# EAGLE board 7x6keyboard_untested (EAGLE 6.5.0)
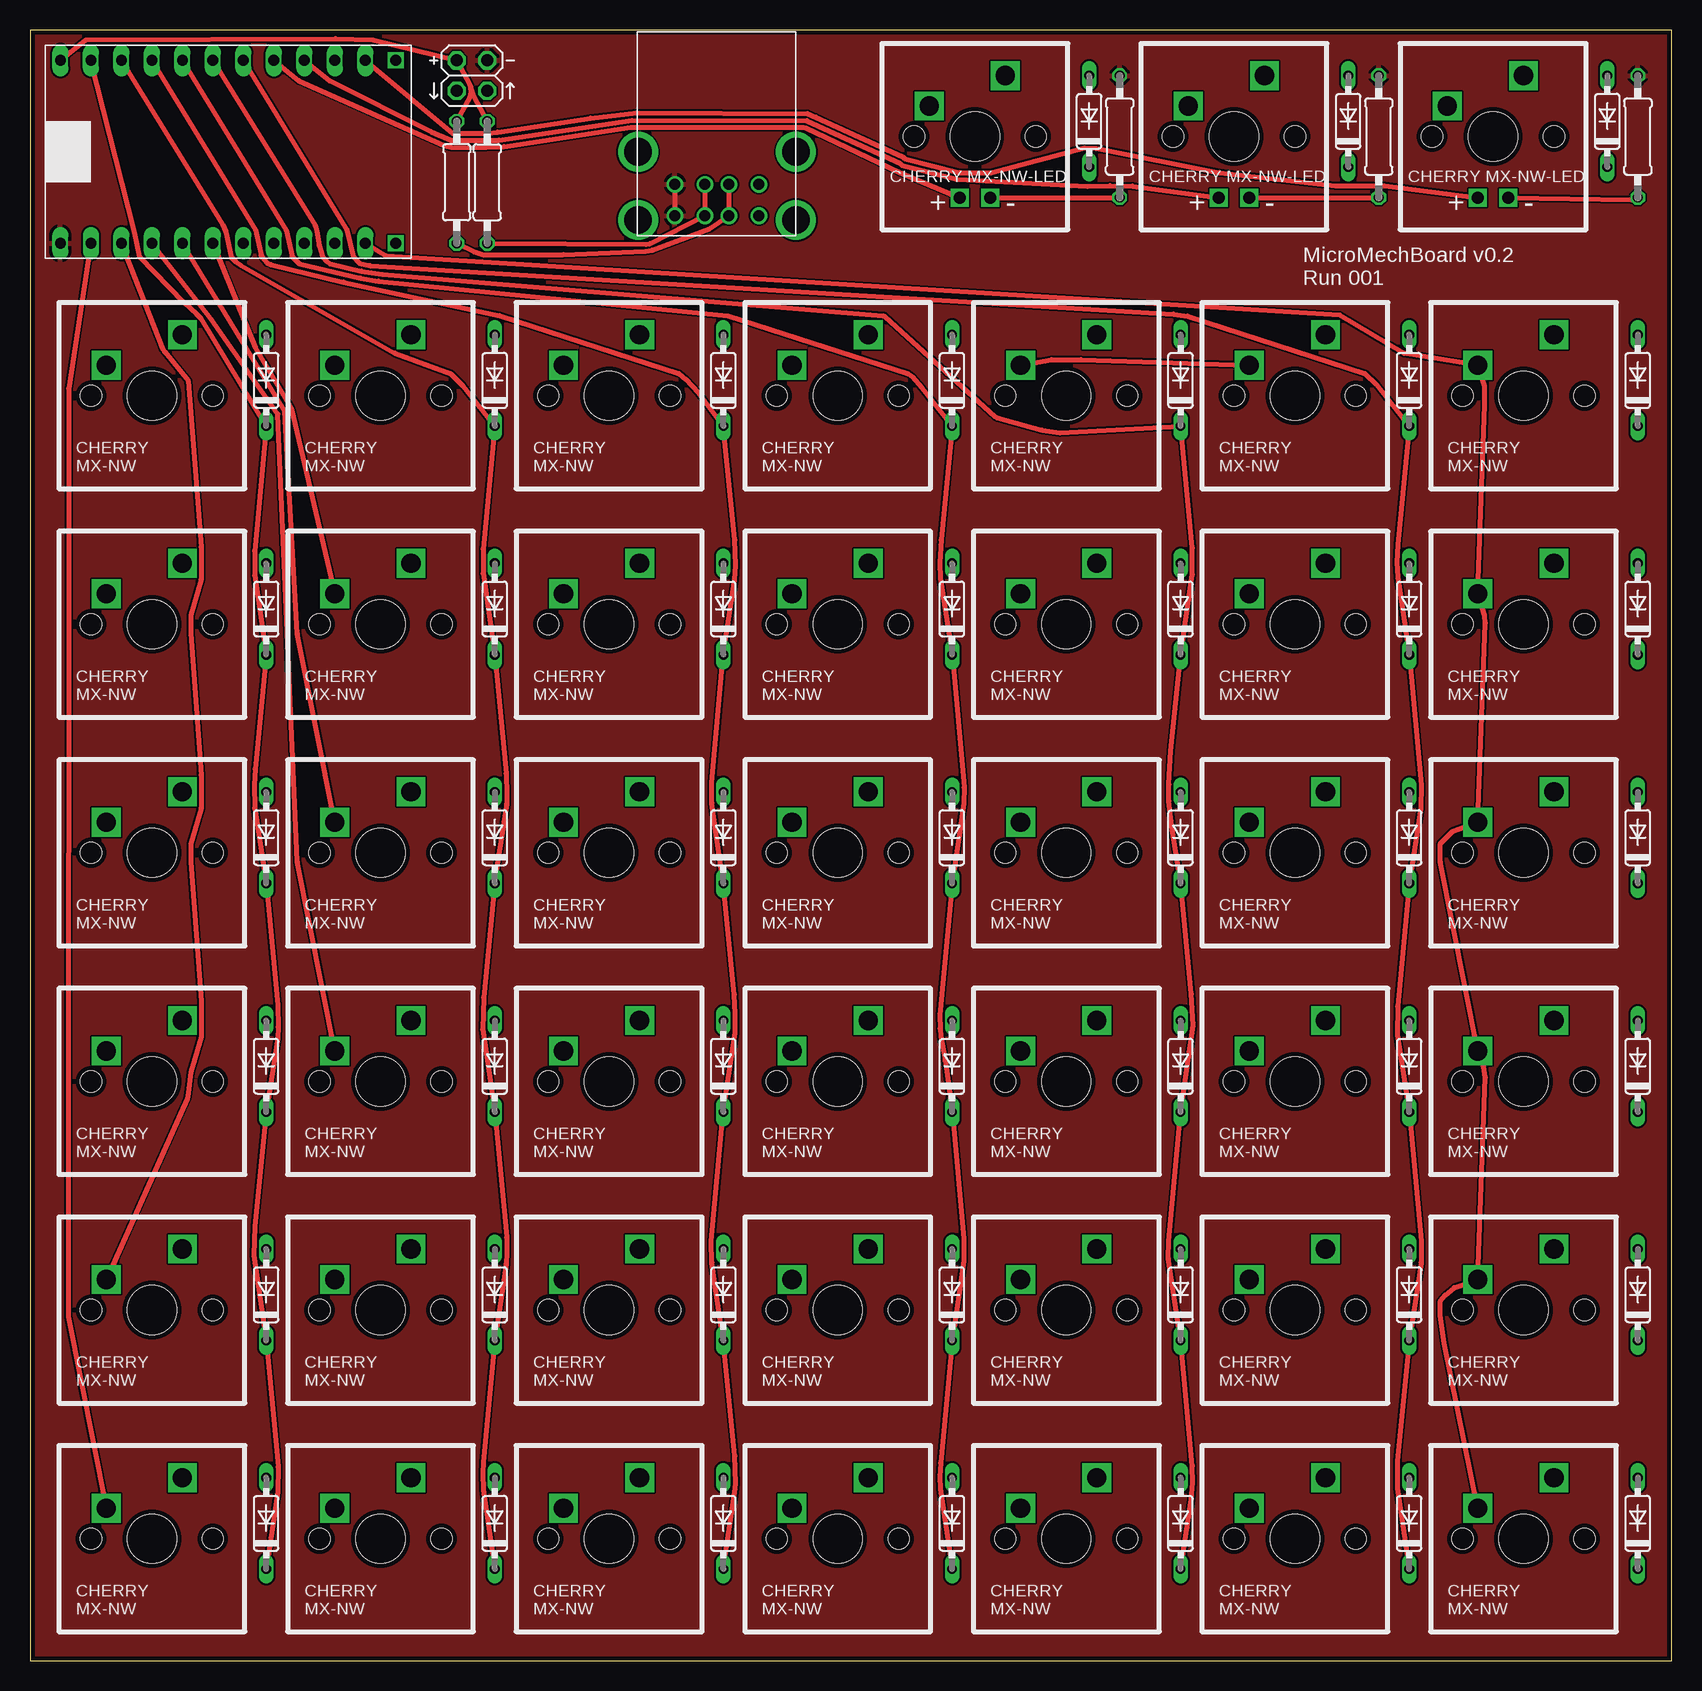
[diagram p0: board, top side]
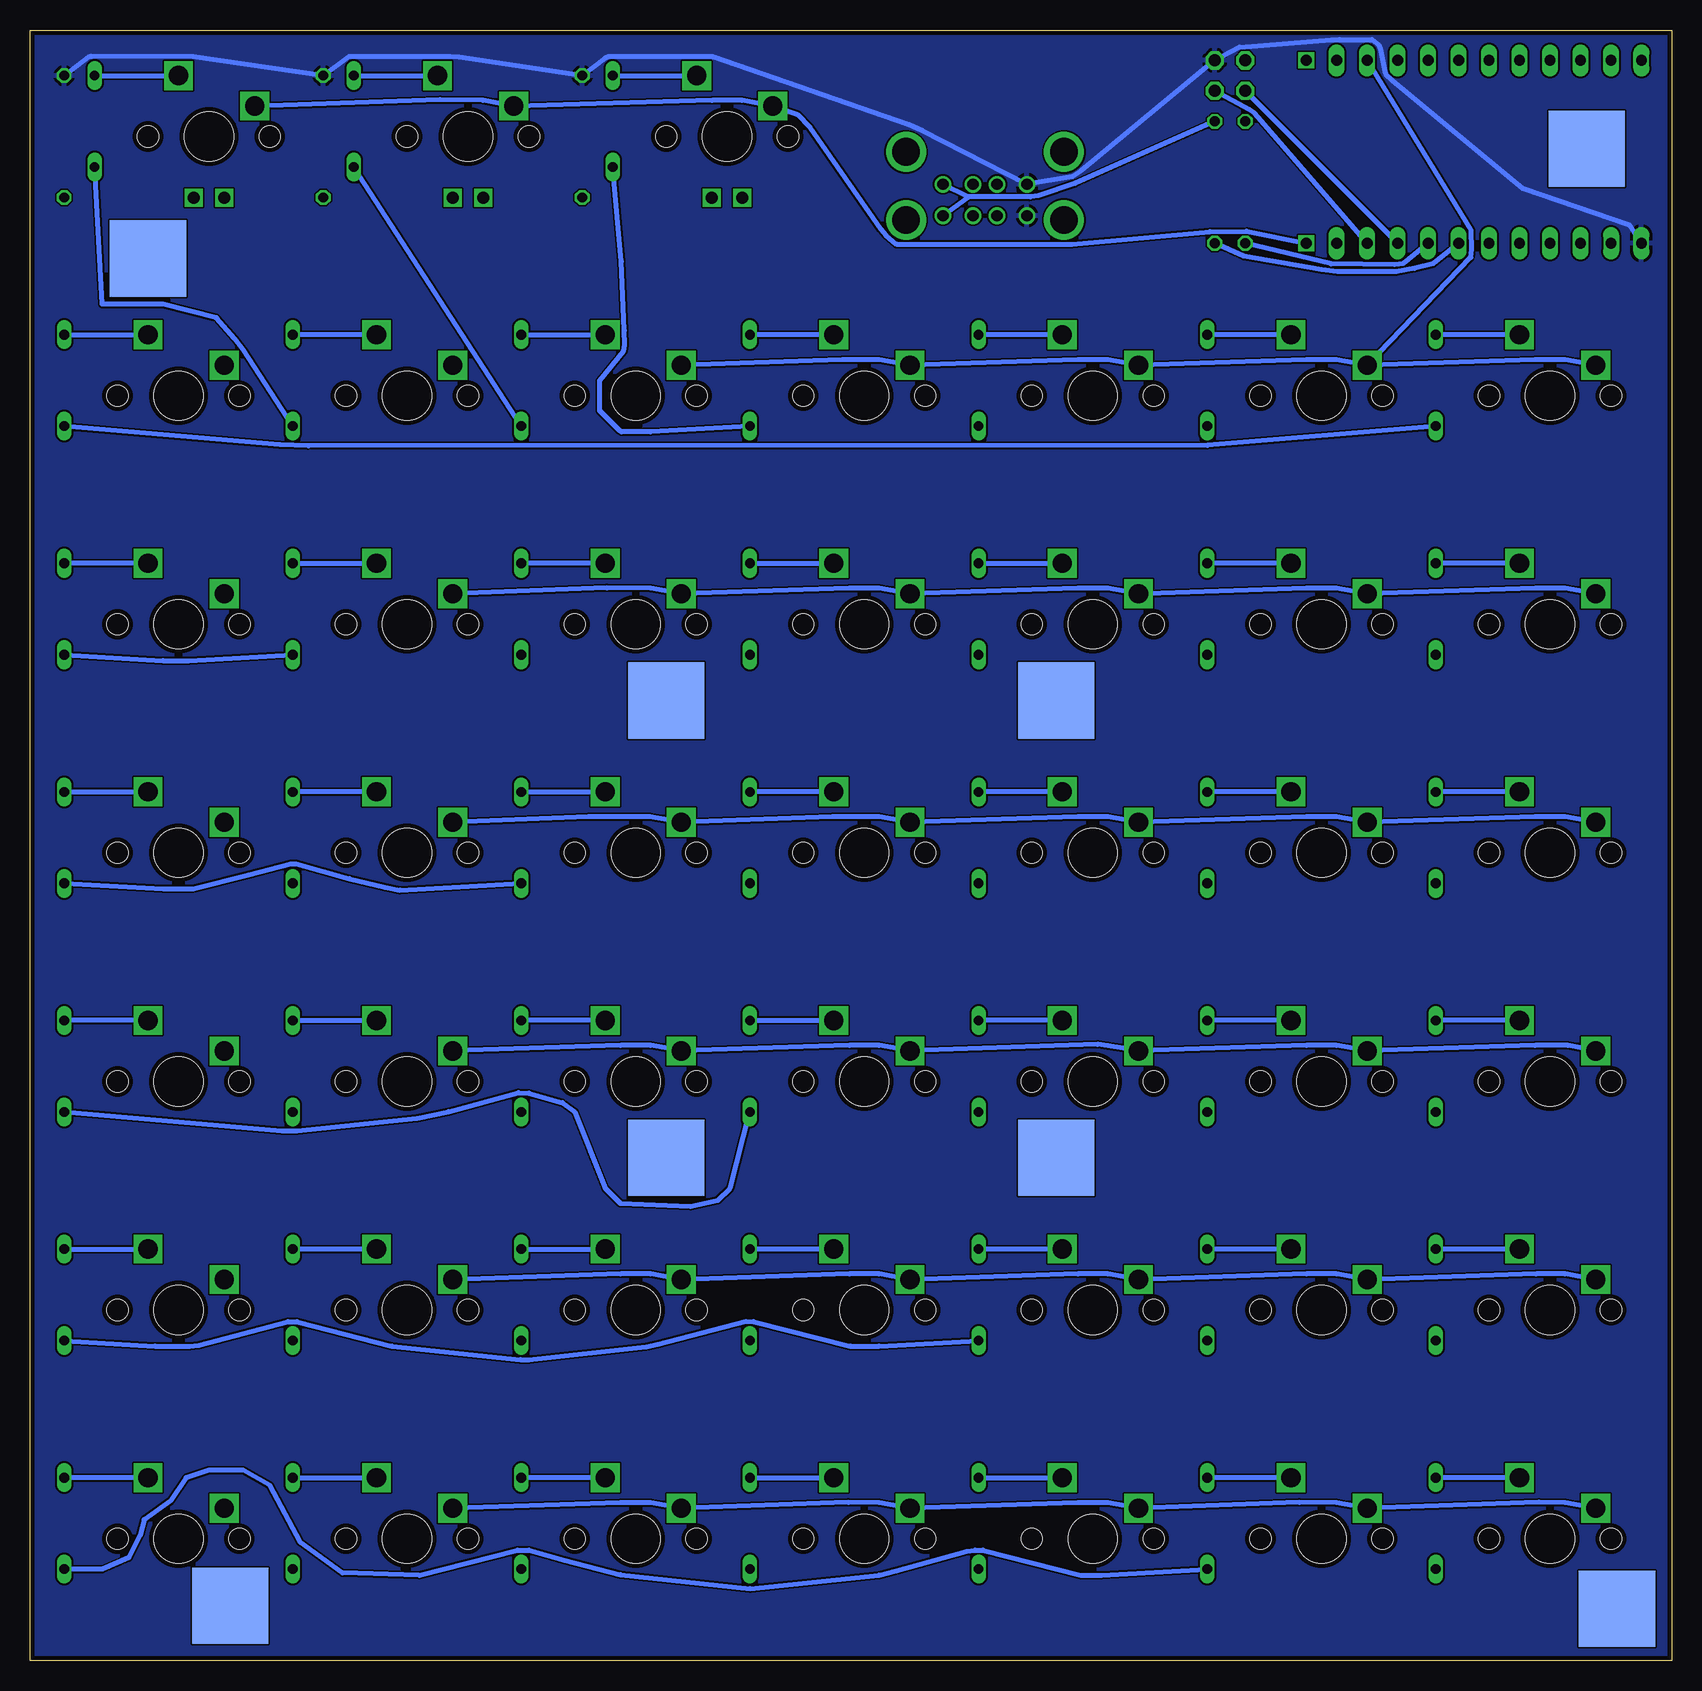
[diagram p1: board, bottom side, seen from below]

Size 136.83 x 135.88 mm. Coordinates in mm from the lower left corner, seen from the top.
Outline: 0,0 136.83,0 136.83,135.88 0,135.88 0,0
Copper layers (1*16): Top 0.0356mm / dielectric 1.5011mm / Bottom 0.0356mm
Design rules "LaenPCBOrder": minimum track width 6mil, minimum drill 13mil, track to track 6mil, track to pad 6mil, pad to pad 6mil, via to via 6mil, smd to smd 6mil, copper to edge 15mil, drill to drill 6mil, minimum pad ring 7mil, minimum via ring 7mil, stop-mask expansion 4mil, vias tented up to drill 0mil, thermal gap 10mil

## Footprints (pad centres in the part's own frame; a part is rotated, then mirrored left to right if it is on the bottom)
DO35-7 = drill 0.813 long: A 3.81,0; C -3.81,0
2X02 = drill 1.016 octagon: 1 -1.27,-1.27; 2 -1.27,1.27; 3 1.27,-1.27; 4 1.27,1.27
0207/10 = drill 0.813 octagon: 1 -5.08,0; 2 5.08,0
CHERRYMX-NN = drill 1.6 square: SIDE -3.81,2.54; UP 2.54,5.08 | hole 1.753: -5.08,0; 5.08,0 | hole 4.089: 0,0
TEENSY2 = drill 0.9 long: GND -7.62,16.51; PB0 -7.62,13.97; PB1 -7.62,11.43; PB2 -7.62,8.89; PB3 -7.62,6.35; PB4 7.62,-6.35; PB5 7.62,-3.81; PB6 7.62,-1.27; PB7 -7.62,3.81; PC6 -7.62,-8.89; PD0 -7.62,1.27; PD1 -7.62,-1.27; PD2 -7.62,-3.81; PD3 -7.62,-6.35; PD7 7.62,-8.89; PF0 7.62,13.97; PF1 7.62,11.43; PF4 7.62,8.89; PF5 7.62,6.35; PF6 7.62,3.81; PF7 7.62,1.27; VCC 7.62,16.51 | drill 0.9 square: PC7 -7.62,-11.43; PD6 7.62,-11.43
CHERRYMX-NN-LED = drill 1 square: LED+ -1.27,-5.08; LED- 1.27,-5.08 | drill 1.6 square: SIDE -3.81,2.54; UP 2.54,5.08 | hole 1.753: -5.08,0; 5.08,0 | hole 4.089: 0,0
DUAL-USB-A = drill 0.92: +DATA_1 7.57,2.71; +DATA_2 7.57,5.33; -DATA_1 5.57,2.71; -DATA_2 5.57,5.33; GND_1 10.07,2.71; GND_2 10.07,5.33; VCC_1 3.07,2.71; VCC_2 3.07,5.33 | drill 2.3: S1 0,5.68; S2 0,0; S3 13.14,5.68; S4 13.14,0
MOUNTING-PAD = smd 6.35 x 6.35 bottom: P$1 0,0

## Placement (x,y rotation side)
D1  [DO35-7]  19.68,49.53 90 top
D2  [DO35-7]  38.73,49.53 90 top
D3  [DO35-7]  57.78,49.53 90 top
D4  [DO35-7]  76.83,49.53 90 top
D5  [DO35-7]  95.89,49.53 90 top
D6  [DO35-7]  114.94,49.53 90 top
D7  [DO35-7]  19.68,68.58 90 top
D8  [DO35-7]  38.73,68.58 90 top
D9  [DO35-7]  57.78,68.58 90 top
D10  [DO35-7]  76.83,68.58 90 top
D11  [DO35-7]  95.89,68.58 90 top
D12  [DO35-7]  114.94,68.58 90 top
D13  [DO35-7]  19.68,11.43 90 top
D14  [DO35-7]  38.73,11.43 90 top
D15  [DO35-7]  57.78,11.43 90 top
D16  [DO35-7]  76.83,11.43 90 top
D17  [DO35-7]  95.89,11.43 90 top
D18  [DO35-7]  114.94,11.43 90 top
D19  [DO35-7]  19.68,30.48 90 top
D20  [DO35-7]  38.73,30.48 90 top
D21  [DO35-7]  57.78,30.48 90 top
D22  [DO35-7]  76.83,30.48 90 top
D23  [DO35-7]  95.89,30.48 90 top
D24  [DO35-7]  114.94,30.48 90 top
D25  [DO35-7]  19.68,87.63 90 top
D26  [DO35-7]  38.73,87.63 90 top
D27  [DO35-7]  57.78,87.63 90 top
D28  [DO35-7]  76.83,87.63 90 top
D29  [DO35-7]  95.89,87.63 90 top
D30  [DO35-7]  114.94,87.63 90 top
D31  [DO35-7]  133.99,49.53 90 top
D32  [DO35-7]  133.99,68.58 90 top
D33  [DO35-7]  133.99,11.43 90 top
D34  [DO35-7]  133.99,30.48 90 top
D35  [DO35-7]  133.99,87.63 90 top
D36  [DO35-7]  19.68,106.68 90 top
D37  [DO35-7]  38.73,106.68 90 top
D38  [DO35-7]  57.78,106.68 90 top
D39  [DO35-7]  76.83,106.68 90 top
D40  [DO35-7]  95.89,106.68 90 top
D41  [DO35-7]  114.94,106.68 90 top
D42  [DO35-7]  133.99,106.68 90 top
D43  [DO35-7]  131.44,128.27 90 top
D44  [DO35-7]  109.86,128.27 90 top
D45  [DO35-7]  88.27,128.27 90 top
JP1  UART  [2X02]  36.83,132.08 270 top
R1  150  [0207/10]  133.99,127 270 top
R2  150  [0207/10]  112.39,127 270 top
R3  150  [0207/10]  90.81,127 270 top
R4  3.3K  [0207/10]  35.56,123.19 90 top
R5  3.3K  [0207/10]  38.1,123.19 270 top
U$1  CHERRY-MX1A-E1NW  [CHERRYMX-NN]  29.21,48.26 0 top
U$2  CHERRY-MX1A-E1NW  [CHERRYMX-NN]  10.16,48.26 0 top
U$3  CHERRY-MX1A-E1NW  [CHERRYMX-NN]  48.26,48.26 0 top
U$4  CHERRY-MX1A-E1NW  [CHERRYMX-NN]  67.31,48.26 0 top
U$5  CHERRY-MX1A-E1NW  [CHERRYMX-NN]  86.36,48.26 0 top
U$6  CHERRY-MX1A-E1NW  [CHERRYMX-NN]  105.41,48.26 0 top
U$7  CHERRY-MX1A-E1NW  [CHERRYMX-NN]  10.16,67.31 0 top
U$8  CHERRY-MX1A-E1NW  [CHERRYMX-NN]  29.21,67.31 0 top
U$9  CHERRY-MX1A-E1NW  [CHERRYMX-NN]  48.26,67.31 0 top
U$10  CHERRY-MX1A-E1NW  [CHERRYMX-NN]  67.31,67.31 0 top
U$11  CHERRY-MX1A-E1NW  [CHERRYMX-NN]  86.36,67.31 0 top
U$12  CHERRY-MX1A-E1NW  [CHERRYMX-NN]  105.41,67.31 0 top
U$13  CHERRY-MX1A-E1NW  [CHERRYMX-NN]  10.16,10.16 0 top
U$14  CHERRY-MX1A-E1NW  [CHERRYMX-NN]  29.21,10.16 0 top
U$15  CHERRY-MX1A-E1NW  [CHERRYMX-NN]  48.26,10.16 0 top
U$16  CHERRY-MX1A-E1NW  [CHERRYMX-NN]  67.31,10.16 0 top
U$17  CHERRY-MX1A-E1NW  [CHERRYMX-NN]  86.36,10.16 0 top
U$18  CHERRY-MX1A-E1NW  [CHERRYMX-NN]  105.41,10.16 0 top
U$19  CHERRY-MX1A-E1NW  [CHERRYMX-NN]  10.16,29.21 0 top
U$20  CHERRY-MX1A-E1NW  [CHERRYMX-NN]  29.21,29.21 0 top
U$21  CHERRY-MX1A-E1NW  [CHERRYMX-NN]  48.26,29.21 0 top
U$22  CHERRY-MX1A-E1NW  [CHERRYMX-NN]  67.31,29.21 0 top
U$23  CHERRY-MX1A-E1NW  [CHERRYMX-NN]  86.36,29.21 0 top
U$24  CHERRY-MX1A-E1NW  [CHERRYMX-NN]  105.41,29.21 0 top
U$25  CHERRY-MX1A-E1NW  [CHERRYMX-NN]  10.16,86.36 0 top
U$26  CHERRY-MX1A-E1NW  [CHERRYMX-NN]  29.21,86.36 0 top
U$27  CHERRY-MX1A-E1NW  [CHERRYMX-NN]  48.26,86.36 0 top
U$28  CHERRY-MX1A-E1NW  [CHERRYMX-NN]  67.31,86.36 0 top
U$29  CHERRY-MX1A-E1NW  [CHERRYMX-NN]  86.36,86.36 0 top
U$30  CHERRY-MX1A-E1NW  [CHERRYMX-NN]  105.41,86.36 0 top
U$31  TEENSY2-CC-VERSION  [TEENSY2]  19.05,125.73 90 top
U$32  CHERRY-MX1A-E1NW-LED  [CHERRYMX-NN-LED]  121.92,127 0 top
U$33  CHERRY-MX1A-E1NW-LED  [CHERRYMX-NN-LED]  100.33,127 0 top
U$34  CHERRY-MX1A-E1NW-LED  [CHERRYMX-NN-LED]  78.74,127 0 top
U$35  DUAL-USB-A  [DUAL-USB-A]  63.82,125.73 180 top
U$36  CHERRY-MX1A-E1NW  [CHERRYMX-NN]  124.46,48.26 0 top
U$37  CHERRY-MX1A-E1NW  [CHERRYMX-NN]  124.46,67.31 0 top
U$38  CHERRY-MX1A-E1NW  [CHERRYMX-NN]  124.46,10.16 0 top
U$39  CHERRY-MX1A-E1NW  [CHERRYMX-NN]  124.46,29.21 0 top
U$40  CHERRY-MX1A-E1NW  [CHERRYMX-NN]  124.46,86.36 0 top
U$41  CHERRY-MX1A-E1NW  [CHERRYMX-NN]  10.16,105.41 0 top
U$42  CHERRY-MX1A-E1NW  [CHERRYMX-NN]  29.21,105.41 0 top
U$43  CHERRY-MX1A-E1NW  [CHERRYMX-NN]  48.26,105.41 0 top
U$44  CHERRY-MX1A-E1NW  [CHERRYMX-NN]  67.31,105.41 0 top
U$45  CHERRY-MX1A-E1NW  [CHERRYMX-NN]  86.36,105.41 0 top
U$46  CHERRY-MX1A-E1NW  [CHERRYMX-NN]  105.41,105.41 0 top
U$47  CHERRY-MX1A-E1NW  [CHERRYMX-NN]  124.46,105.41 0 top
U$48  MOUNTING-PAD  [MOUNTING-PAD]  7.11,125.98 0 top
U$49  MOUNTING-PAD  [MOUNTING-PAD]  4.57,4.32 0 top
U$50  MOUNTING-PAD  [MOUNTING-PAD]  51.31,41.91 0 top
U$51  MOUNTING-PAD  [MOUNTING-PAD]  83.82,41.91 0 top
U$52  MOUNTING-PAD  [MOUNTING-PAD]  120.14,4.57 0 top
U$53  MOUNTING-PAD  [MOUNTING-PAD]  51.31,80.01 0 top
U$54  MOUNTING-PAD  [MOUNTING-PAD]  83.82,80.01 0 top
U$55  MOUNTING-PAD  [MOUNTING-PAD]  127,116.84 0 top

## Library data of the parts
D1-D45 = diode
JP1 = pinhead
R1-R3 = rcl
R4 R5 = resistor
U$1-U$30 U$32-U$55 = my_parts
U$31 = teensy2

## Nets
GND: JP1.2 R1.1 R2.1 R3.1 U$31.GND U$35.GND_1 U$35.GND_2
N$1: D1.A U$2.UP
N$2: D2.A U$1.UP
N$3: D3.A U$3.UP
N$4: D4.A U$4.UP
N$5: D5.A U$5.UP
N$6: D6.A U$6.UP
N$7: D7.A U$7.UP
N$8: D8.A U$8.UP
N$9: D9.A U$9.UP
N$10: D10.A U$10.UP
N$11: D11.A U$11.UP
N$12: D12.A U$12.UP
N$13: D13.A U$13.UP
N$14: D14.A U$14.UP
N$15: D15.A U$15.UP
N$16: D16.A U$16.UP
N$17: D17.A U$17.UP
N$18: D18.A U$18.UP
N$19: D19.A U$19.UP
N$20: D20.A U$20.UP
N$21: D21.A U$21.UP
N$22: D22.A U$22.UP
N$23: D23.A U$23.UP
N$24: D24.A U$24.UP
N$25: D25.A U$25.UP
N$26: D26.A U$26.UP
N$27: D27.A U$27.UP
N$28: D28.A U$28.UP
N$29: D29.A U$29.UP
N$30: D30.A U$30.UP
N$31: D1.C D7.C D13.C D19.C D25.C D36.C D42.C U$31.PF0
N$32: D2.C D8.C D14.C D20.C D26.C D33.C D37.C U$31.PF1
N$33: D3.C D9.C D15.C D21.C D27.C D34.C D38.C U$31.PF4
N$34: D4.C D10.C D16.C D22.C D28.C D31.C D39.C D45.C U$31.PF5
N$35: D5.C D11.C D17.C D23.C D29.C D32.C D40.C D44.C U$31.PF6
N$36: D6.C D12.C D18.C D24.C D30.C D35.C D41.C D43.C U$31.PF7
N$37: U$19.SIDE U$20.SIDE U$21.SIDE U$22.SIDE U$23.SIDE U$24.SIDE U$31.PB1
N$38: U$1.SIDE U$2.SIDE U$3.SIDE U$4.SIDE U$5.SIDE U$6.SIDE U$31.PB2
N$39: U$7.SIDE U$8.SIDE U$9.SIDE U$10.SIDE U$11.SIDE U$12.SIDE U$31.PB3
N$40: U$25.SIDE U$26.SIDE U$27.SIDE U$28.SIDE U$29.SIDE U$30.SIDE U$31.PB7
N$41: U$13.SIDE U$14.SIDE U$15.SIDE U$16.SIDE U$17.SIDE U$18.SIDE U$31.PB0
N$42: R1.2 U$32.LED-
N$43: R2.2 U$33.LED-
N$44: R3.2 U$34.LED-
N$45: JP1.3 U$31.PD2
N$46: D36.A U$41.UP
N$47: D37.A U$42.UP
N$48: D45.A U$34.UP
N$49: U$31.PB5 U$33.LED+
N$50: D43.A U$32.UP
N$51: D31.A U$36.UP
N$52: D32.A U$37.UP
N$53: D33.A U$38.UP
N$54: D38.A U$43.UP
N$55: JP1.4 U$31.PD3
N$56: D34.A U$39.UP
N$57: R4.1 U$31.PD1 U$35.-DATA_1 U$35.-DATA_2
N$58: R5.2 U$31.PD0 U$35.+DATA_1 U$35.+DATA_2
N$59: D35.A U$40.UP
N$60: U$31.PC6 U$36.SIDE U$37.SIDE U$38.SIDE U$39.SIDE U$40.SIDE U$47.SIDE
N$61: D39.A U$44.UP
N$62: D40.A U$45.UP
N$63: D41.A U$46.UP
N$64: U$31.PB4 U$41.SIDE U$42.SIDE U$43.SIDE U$44.SIDE U$45.SIDE U$46.SIDE
N$65: D42.A U$47.UP
N$67: D44.A U$33.UP
N$68: U$31.PD7 U$32.LED+
N$69: U$31.PC7 U$32.SIDE U$33.SIDE U$34.SIDE
N$70: U$31.PB6 U$34.LED+
VCC: JP1.1 R4.2 R5.1 U$31.VCC U$35.VCC_1 U$35.VCC_2

## Tracks (layer width: path | path; a pad name or v marks a point on that pad's centre or on a via)
GND
  Top 0.406: U$35.GND_1 U$35.GND_2
  Bottom 0.406: R1.1 131.96,133.62 131.71,133.67 123.27,133.65 R2.1 110.25,133.66 101.85,133.66 101.06,133.62 R3.1 88.91,133.54 88.59,133.66 79.93,133.64 63.58,128 62.47,127.49 U$35.GND_1 49.95,123.66 49.25,124.16 JP1.2 36.04,134.46 28.38,135.05 27.73,135.07 24.99,135.07 24.44,134.63 24.29,134.33 23.89,132.25 23.33,131.67 12.45,122.68 3.56,119.63 U$31.GND
  pour Bottom: 0,135.89 137.16,135.89 137.16,0 0,0
  pour Top: 0,135.89 137.16,135.89 137.16,0 0,0
N$1
  Bottom 0.406: U$2.UP D1.A
N$2
  Bottom 0.406: U$1.UP D2.A
N$3
  Bottom 0.406: U$3.UP D3.A
N$4
  Bottom 0.406: D4.A U$4.UP
N$5
  Bottom 0.406: U$5.UP D5.A
N$6
  Bottom 0.406: D6.A U$6.UP
N$7
  Bottom 0.406: U$7.UP D7.A
N$8
  Bottom 0.406: U$8.UP D8.A
N$9
  Bottom 0.406: U$9.UP D9.A
N$10
  Bottom 0.406: U$10.UP D10.A
N$11
  Bottom 0.406: D11.A U$11.UP
N$12
  Bottom 0.406: U$12.UP D12.A
N$13
  Bottom 0.406: U$13.UP D13.A
N$14
  Bottom 0.406: U$14.UP D14.A
N$15
  Bottom 0.406: D15.A U$15.UP
N$16
  Bottom 0.406: D16.A U$16.UP
N$17
  Bottom 0.406: U$17.UP D17.A
N$18
  Bottom 0.406: D18.A U$18.UP
N$19
  Bottom 0.406: U$19.UP D19.A | D19.A
N$20
  Bottom 0.406: U$20.UP D20.A
N$21
  Bottom 0.406: U$21.UP D21.A
N$22
  Bottom 0.406: U$22.UP D22.A
N$23
  Bottom 0.406: D23.A U$23.UP
N$24
  Bottom 0.406: U$24.UP D24.A
N$25
  Bottom 0.406: U$25.UP D25.A
N$26
  Bottom 0.406: U$26.UP D26.A
N$27
  Bottom 0.406: D27.A U$27.UP
N$28
  Bottom 0.406: D28.A U$28.UP
N$29
  Bottom 0.406: U$29.UP D29.A
N$30
  Bottom 0.406: D30.A U$30.UP
N$31
  Top 0.406: U$31.PF0 8.72,119 9.13,117 12.87,113.14 13.91,112.19 14.26,111.84 D36.C 18.72,92.45 18.72,90.43 D25.C 18.77,74.29 18.7,72.99 18.71,71.03 D7.C 20.65,54.62 20.67,52.79 20.64,51.85 D1.C 18.74,36.2 18.66,33.77 D19.C 20.67,16.13 20.65,14.08 D13.C
  Bottom 0.406: D36.C 38.73,101.26 113.62,101.22 116.01,101.32 D42.C
N$32
  Top 0.406: U$31.PF1 16.07,119.65 16.32,119.05 16.77,116.95 17.14,116.57 17.57,116.27 30.41,108.95 35.05,107.25 36.08,106.22 D37.C 37.76,92.61 37.76,90.6 D26.C 39.68,73.9 39.74,72.15 39.71,71.39 38.87,65.84 D8.C 37.8,55.24 37.72,52.6 D2.C 39.72,35.27 39.73,33.99 39.68,33.06 D20.C 37.78,16.55 37.75,15.59 37.77,14.23 D14.C
  Bottom 0.406: D14.C 47.55,7.1 49.25,7.1 57.42,9.2 58.08,9.2 58.77,9.1 64.62,7.46 66.08,7.12 76.81,6 87.64,7.16 92.28,8.34 95.24,9.2 96.21,9.21 104.38,7.11 110.81,7.3 114.3,9.84 116.84,14.61 119.06,15.88 121.92,15.88 123.83,15.24 125.09,13.34 127.32,11.75 127.64,10.48 128.59,8.57 130.81,7.62 D33.C
N$33
  Top 0.406: U$31.PF4 18.79,119.21 18.86,118.92 19.26,117.09 19.3,116.97 19.72,116.5 20.09,116.34 26.12,114.87 39.13,112.07 54.1,107.25 54.66,106.76 55.68,105.67 D38.C 58.73,93.39 58.8,91.26 58.73,90.05 D27.C 56.8,73.17 56.82,71.44 D9.C 58.7,55.49 58.76,53.91 58.75,52.33 D3.C 56.76,34.93 56.82,33.15 D21.C 58.73,17.07 58.8,14.79 58.73,14.03 D15.C
  Bottom 0.406: D34.C 126.43,26.2 123.53,26.18 122.76,26.27 115.33,28.25 114.6,28.25 106.68,26.2 95.97,25.07 95.26,25.07 85.46,26.14 84.53,26.36 77.17,28.26 76.52,28.25 68.47,26.2 66.06,26.2 D21.C
N$34
  Top 0.406: U$31.PF5 21.35,119.21 21.84,116.99 22.43,116.41 27.54,115.2 29.03,114.95 58.17,112.06 73.17,107.22 73.52,106.99 74.33,106.06 D39.C 75.92,93.4 75.82,91.47 75.86,90.19 D28.C 77.85,72.76 77.83,71.46 D10.C 75.81,53.77 75.83,52.66 75.92,52.02 76.27,50.01 D4.C 77.82,35.16 77.82,33.33 D22.C 75.89,16.47 75.83,15.33 75.86,14.33 D16.C
  Bottom 0.406: D39.C 85.11,102.4 87.56,102.4 87.67,102.46 89.37,104.16 89.37,106.66 87.36,109.12 87.27,109.63 87.3,110.85 87.56,116.6 D45.C | D31.C 115.84,44.15 114.58,44.13 104.57,45.19 101.95,45.74 96.12,47.33 95.25,47.28 92.47,46.5 91.44,45.72 88.9,39.37 87.63,38.1 81.79,37.85 79.5,38.35 78.49,39.37 D4.C
N$35
  Top 0.406: U$31.PF6 23.76,119.59 23.91,119.09 24.1,117.91 24.41,116.92 24.69,116.63 25,116.4 27.61,115.79 29.37,115.51 71.1,112.05 71.23,112.02 80.42,103.66 80.59,103.56 84.34,102.54 85.83,102.31 D40.C 96.86,92.72 96.86,90.49 D29.C 95.05,75.8 94.9,73.01 94.9,71.62 95.15,69.53 D11.C 96.79,55.55 96.93,52.94 D5.C 94.89,34.93 94.86,33.52 D23.C 96.86,16.21 96.89,14.83 96.78,13.42 D17.C
  Bottom 0.406: D40.C D44.C | D44.C | D32.C 125.71,64.3 123.21,64.3 118.62,65.47 115.11,66.4 114.66,66.4 110.21,65.15 107.24,64.44 106,64.19 D11.C
N$36
  Top 0.406: U$31.PF7 26.41,119.25 26.94,116.97 27.45,116.43 28.35,116.24 95.3,112.2 96.47,112.03 111.25,107.25 112.17,106.37 D41.C 113.99,92.97 113.91,91.52 113.98,90.3 D30.C 115.95,72.95 115.9,71.03 D12.C 113.97,54.53 113.95,52.16 D6.C 115.94,34.95 115.94,33.15 D24.C 113.94,16.6 113.94,14.36 D18.C
  Bottom 0.406: D41.C 119.07,109.24 119.77,110.17 121.29,111.9 125.73,113.03 130.81,113.03 D43.C | D35.C 125.76,83.33 123.61,83.3 D30.C
N$37
  Top 0.406: U$31.PB1 11.07,109.29 11.22,109.06 13.17,106.66 14.26,92.79 14.26,90.09 13.4,87.12 13.4,85.6 14.26,73.78 14.26,71.04 13.4,68.07 13.4,66.55 14.28,54.92 14.28,52 13.4,49.02 13.2,47.26 13.11,46.8 U$19.SIDE
  Bottom 0.406: U$19.SIDE 8.91,32.22 11.33,32.22 U$20.SIDE 27.96,32.22 30.46,32.22 U$21.SIDE 47.01,32.22 49.51,32.22 U$22.SIDE 66.06,32.22 68.56,32.22 U$23.SIDE 85.11,32.22 87.61,32.22 U$24.SIDE
N$38
  Top 0.406: U$1.SIDE 22.29,66.55 20.65,103.88 15.08,111.8 U$31.PB2
  Bottom 0.406: U$2.SIDE 8.67,51.27 11.41,51.27 U$1.SIDE 27.96,51.27 30.46,51.27 U$3.SIDE 47.02,51.25 47.87,51.36 U$4.SIDE 66.06,51.27 68.55,51.27 U$5.SIDE 85.11,51.27 87.61,51.27 U$6.SIDE
N$39
  Top 0.406: U$8.SIDE 22.29,85.58 21.21,104.11 U$31.PB3
  Bottom 0.406: U$7.SIDE 8.91,70.32 11.41,70.32 U$8.SIDE 27.96,70.32 30.46,70.32 U$9.SIDE 47.01,70.32 49.51,70.32 U$10.SIDE 66.06,70.32 69.93,70.32 U$11.SIDE 85.18,70.32 90.28,70.33 U$12.SIDE
N$40
  Top 0.406: U$31.PB7 18.78,109.38 21.77,104.34 U$26.SIDE
  Bottom 0.406: U$25.SIDE 8.91,89.37 11.37,89.37 U$26.SIDE 27.96,89.37 30.46,89.37 43.81,88.92 U$27.SIDE 47.01,89.37 49.51,89.37 U$28.SIDE 66.06,89.37 68.55,89.37 U$29.SIDE 85.11,89.37 88.75,89.4 U$30.SIDE
N$41
  Top 0.406: U$31.PB0 3.23,105.99 3.21,28.64 U$13.SIDE
  Bottom 0.406: U$13.SIDE 8.9,13.17 11.09,13.21 U$14.SIDE 27.96,13.17 31.05,13.18 U$15.SIDE 47.01,13.17 49.51,13.17 U$16.SIDE 66.06,13.17 68.63,13.17 U$17.SIDE 85.11,13.17 87.61,13.17 U$18.SIDE | U$18.SIDE
N$42
  Top 0.406: U$32.LED- 133.43,121.74 R1.2
N$43
  Top 0.406: U$33.LED- R2.2
N$44
  Top 0.406: U$34.LED- R3.2
N$45
  Bottom 0.406: JP1.3 U$31.PD2
N$46
  Bottom 0.406: U$41.UP D36.A
N$47
  Bottom 0.406: U$42.UP D37.A
N$48
  Bottom 0.406: D45.A U$34.UP
N$49
  Top 0.406: U$31.PB5 24.97,131.65 33.42,127.42 35.11,126.69 39.06,126.71 50.18,128.35 64.73,128.33 72.51,124.76 72.67,124.6 77.26,123.43 88.14,122.86 90.02,122.91 91.88,122.87 U$33.LED+
N$50
  Bottom 0.406: D43.A U$32.UP
N$51
  Bottom 0.406: U$36.UP D31.A
N$52
  Bottom 0.406: D32.A U$37.UP
N$53
  Bottom 0.406: U$38.UP D33.A
N$54
  Bottom 0.406: U$43.UP D38.A
N$55
  Bottom 0.406: U$31.PD3 34.77,128.96 35.2,129.24 JP1.4
N$56
  Bottom 0.406: D34.A U$39.UP
N$57
  Top 0.406: U$35.-DATA_1 U$35.-DATA_2 56.65,119.32 51.85,117.54 51.29,117.43 44.44,117.17 37.79,117.14 37.01,117.4 R4.1
  Bottom 0.406: U$31.PD1 22.41,116.42 23.14,116.33 28.39,116.38 R4.1
N$58
  Top 0.406: U$35.+DATA_1 U$35.+DATA_2 51.68,118.09 51.32,118.02 R5.2
  Bottom 0.406: U$31.PD0 19.89,116.41 21.44,116.01 22.96,115.75 27.88,115.75 29.2,115.92 35.68,117.04 R5.2
N$59
  Bottom 0.406: U$40.UP D35.A
N$60
  Top 0.406: U$31.PC6 29.71,117.04 109.15,112.11 114.48,108.94 U$47.SIDE 121.22,106.17 121.22,104.65 U$40.SIDE 121.21,87.08 121.29,86.45 U$37.SIDE 118.57,69.11 117.54,68.07 117.54,66.55 U$36.SIDE 121.13,49.49 121.27,48.59 U$39.SIDE 118.67,31.09 117.93,30.46 117.54,29.95 117.5,28.79 117.85,26.44 U$38.SIDE
N$61
  Bottom 0.406: U$44.UP D39.A
N$62
  Bottom 0.406: D40.A U$45.UP
N$63
  Bottom 0.406: U$46.UP D41.A
N$64
  Top 0.406: U$45.SIDE 85.11,108.42 87.57,108.42 U$46.SIDE
  Bottom 0.406: U$42.SIDE 16.76,116.94 16.69,117.59 16.75,119.18 U$31.PB4 | U$41.SIDE 8.91,108.42 11.41,108.42 U$42.SIDE | U$42.SIDE | U$42.SIDE 27.96,108.42 30.46,108.42 U$43.SIDE | U$43.SIDE | U$43.SIDE 47.01,108.42 49.51,108.42 U$44.SIDE 66.06,108.42 69.12,108.42 U$45.SIDE
N$65
  Bottom 0.406: D42.A U$47.UP
N$67
  Bottom 0.406: D44.A U$33.UP
N$68
  Top 0.406: U$31.PD7 35.22,127.27 38.14,127.27 38.97,127.37 46.71,128.53 50.59,128.97 64.81,128.91 65.48,128.63 72.74,125.32 72.9,125.16 77.49,123.99 80.08,123.98 87.89,126.07 88.85,126.02 99.11,123.99 108.78,122.89 110.25,122.89 112.88,122.89 U$32.LED+
N$69
  Bottom 0.406: U$31.PC7 35.45,119.13 38.48,119.08 50.01,118.01 64.64,118.03 65.5,118.79 65.92,119.27 71.84,127.78 72.9,128.84 U$34.SIDE 77.49,130.01 79.99,130.01 U$33.SIDE 99.07,130.01 102.66,130.08 U$32.SIDE
N$70
  Top 0.406: U$31.PB6 22.4,131.67 34.56,126.22 35.12,126.11 36.69,126.08 39.49,126.16 50.08,127.77 64.47,127.76 64.63,127.73 72.43,124.04 U$34.LED+
VCC
  Top 0.406: 36.7,131.1 36.72,130.97 36.67,130.33 R4.2 | 36.7,131.1 36.67,131.26 JP1.1 28.58,135.05 25.45,135.15 4.65,135.06 U$31.VCC | R5.1 36.98,130.35 36.73,131.11 36.7,131.1
  Bottom 0.406: R5.1 49.74,123.1 52.79,122.07 53.44,121.97 58.65,121.96 | 58.65,121.96 | 58.65,121.96 U$35.VCC_1 | U$35.VCC_2 58.65,121.92 58.65,121.96

## Text on the board
tPlace: MicroMechBoard v0.2 | Run 001